# Altium PCB PressureSensor.PcbDoc
Units mil, origin at the board's own origin, x right, y up, seen from the top; angles counter-clockwise.
Board outline 460 x 440 mil, 2 copper layers (Top Layer, Bottom Layer); 3 components, 4 nets, 18 pads, 4 vias.
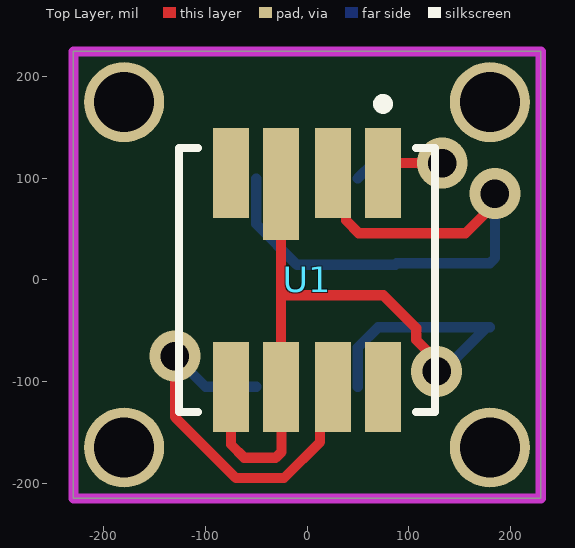
[diagram p0: Top Layer view]
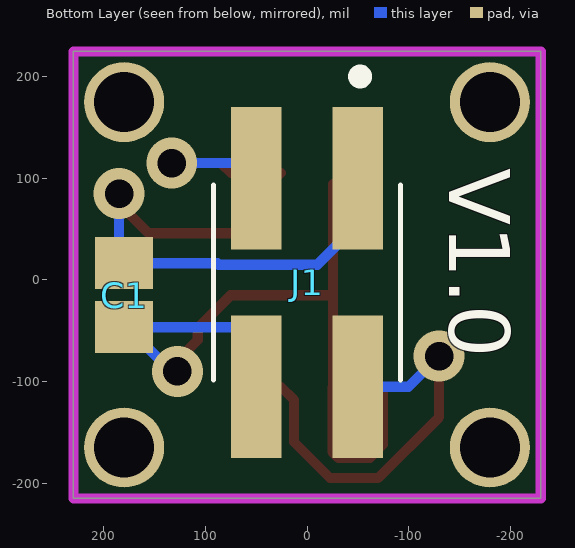
[diagram p1: Bottom Layer view, seen from below]

## Layer stack, top to bottom
Top Solder: solder mask 0.4, Solder Resist, Dk 3.5
Top Layer: signal copper 1.4
Dielectric 1: dielectric 12.6, FR-4, Dk 4.8
Bottom Layer: signal copper 1.4
Bottom Solder: solder mask 0.4, Solder Resist, Dk 3.5

## Board outline
-230,-215 -230,225 230,225 230,-215

## Design rules (kind name [scope] priority, off if disabled: settings)
Clearance [All] p1: gap=10 ignorepadtopadclearanceinfootprint=FALSE except(0: Arc-Hole Track-Hole SMDPad-Hole THPad-Hole Via-Hole Fill-Hole Poly-Hole Region-Hole Text-Hole)
PolygonConnect [All] p1: connectstyle=Relief reliefconductorwidth=10 reliefentries=4 polygonreliefangle="90 Angle" airgapwidth=10
RoutingVias [All] p1: holewidth=28 width=50 viastyle="Through Hole" minholewidth=28 minwidth=50 maxholewidth=28 maxwidth=50
SolderMaskExpansion [All] p1: expansion=4 istentingtop=FALSE
Width [All] p1: maxlimit=10 minlimit=10 preferedwidth=10
30 further rules are at their usual default settings.

## Components (designator, comment, footprint, x,y, rotation, side; value= is the part's Value field where it differs from the comment)
C1 "100nF" CAPC2013X140X50NL20T25 180,-15 r270 bottom
J1 "5-146130-1" TE_5-146130-1 0,-2.56 r270 bottom
U1 "MS580305BA01-00" FP-MS580301BA01-00-MFG 0,0 r90 top

## Footprints (in the part's own frame and the unit in brackets; to place one, negate y for a bottom-side part, rotate by r counter-clockwise, add the part's x,y. Pads: shape width x height; smd on the part's side, far side on the other; paste and mask are expansions set on the pad)
CAPC2013X140X50NL20T25 [mm] "Chip Capacitor, 2-Leads, Body 2.00x1.25mm, IPC Medium Density"
  rect 1.3x1.45 smd: 1(-0.8,0) 2(0.8,0)
  body extent -1.1,-0.72 1.1,0.72, height 1.4
FP-MS580301BA01-00-MFG [mm]
  rect 2.25x0.9 smd paste+0 mask+0: 1(2.675,-1.9) 2(2.675,-0.65) 4(2.675,1.9) 5(-2.675,1.9) 6(-2.675,0.65) 7(-2.675,-0.65) 8(-2.675,-1.9)
  rect 2.8x0.9 smd paste+0 mask+0: 3(2.4,0.65)
  silkscreen extent -3.3,-3.2 4.52,3.2, body extent -3.9,-3.3 3.9,3.3, height 0.25
TE_5-146130-1 [mm]
  rect 3.555x1.27 smd: 1(-2.605,1.27) 2(2.605,1.27) 3(-2.605,-1.27) 4(2.605,-1.27)
  silkscreen extent -5.3,-2.33 2.44,2.33, body extent -3.91,-2.34 4.01,2.34, height 9.84

## Part data
C1: library part CMP-2007-04629-1, Manufacturer="AVX Interconnect / Elco", Part Number=08055C104K4Z2A
J1: "AMPMODU 4 Position Surface Mount Dual Row Straight 2.54 mm Breakaway Header", Package=None, Availability=Unavailable, MF="{'manufacturer': u'TE Connectivity'}", MP=5-146130-1, Price=None
U1: library part CMP-03338-000001-1, "MINIATURE ALTIMETER MODULE", Manufacturer="TE Connectivity", Manufacturer Part Number=MS580301BA01-00, Max Supply Voltage=3.6V, Min Supply Voltage=1.8V, Operating Supply Current=0.9-12.5uA, Package=0, Temperature="-40°C to +85°C", Temperature Range High=+85°C, Temperature Range Low=-40°C, Automotive=No, Category=IC, ComponentLink2Description=Datasheet, ComponentLink2URL=https://www.te.com/commerce/DocumentDelivery/DDEController?Action=showdoc&DocId=Data+Sheet%7FMS5803-01BA%7FB3%7Fpdf%7FEnglish%7FENG_DS_MS5803-01BA_B3.pdf%7FMS580301BA01-00, Device Class L1=Sensors, Device Class L2="Pressure Sensors", Device Class L3=unset, Digikey Description="MINIATURE ALTIMETER MODULE", Height=3.33mm, Lead Free=Yes, Mouser Description="MS5803-01BA Series 3 V 1 to 130 kPa Miniature Variometer Module", Octopart=https://octopart.com/ms580301ba01-00-te+connectivity-59208927, Port Style="No Port", Response Time=8.22ms, RoHS=TRUE, Sensor Output=I2C,SPI, Standoff Height=0.1mm

## Free pads (board coordinates)
  round 78.74 hole 59.06: 5(-180,175) 5(180,-165) 5(180,175) 6(-180,-165)

## Via types
v1: diameter 50, hole 28, Top Layer to Bottom Layer, 4 vias

## Nets (pads, with @x,y where several pads share a name; then routed paths per layer and width w, separated by ;. In a path a pad name is that pad's centre, name@x,y a point inside that pad or via, vN(x,y) a via of type N, cw(c..) or ccw(c..) an arc to the next point about the centre after c; other vN are vias at no path point)
GND_PS_PCB: C1.1 J1.1 U1.2 | length 588.6
  Top Layer w10: U1.2 38.31,92.6 38.31,58.59 50.87,46.02 156.02,46.02 185,75 v1(185,85)
  Bottom Layer w10: J1.1 -50,55.02 -10,15.02 86.88,15.02 88.36,16.5 C1.1 185,21.5 v1(185,85)
SCL_1: J1.3 U1.1 | length 151.5
  Top Layer w10: U1.1 84.49,115 v1(133.04,115)
  Bottom Layer w10: J1.3 65,115 v1(133.04,115)
SDA_1: J1.2 U1.7 | length 394.4
  Top Layer w10: v1(-130,-75) -130,-135 -70,-195 -22.57,-195 12.87,-159.55 12.87,-118.03 U1.7
  Bottom Layer w10: v1(-130,-75) -99.88,-105.12 J1.2
VCC_3V3_PS_PCB: C1.2 J1.4 U1.3 U1.5 U1.6 | length 822.9
  Top Layer w10: U1.5 -74.8,-161.91 -61.72,-175 -30.86,-175 -25,-169.14 -25,-125 -25,-105.91 U1.6 -25.59,-15 ; U1.3 -25.59,-15 ; v1(127.52,-90) 127.52,-79.18 107.52,-59.18 107.52,-47.52 75,-15 -25.59,-15
  Bottom Layer w10: J1.4 50,-66.5 70,-46.5 C1.2 177.05,-46.5 133.54,-90 v1(127.52,-90)
pads on no net: U1.4 U1.8

## Keep-outs
Keep-Out Layer:
  the board outline again, w10

## Silkscreen, mask and mechanical layers (free items; w line width, h text height)
Bottom Overlay:
  text "V1.0" at -140,110 h60 r90